# EAGLE board SlimeVRDiyModular_production (EAGLE 9.6.2), part 1 of 2
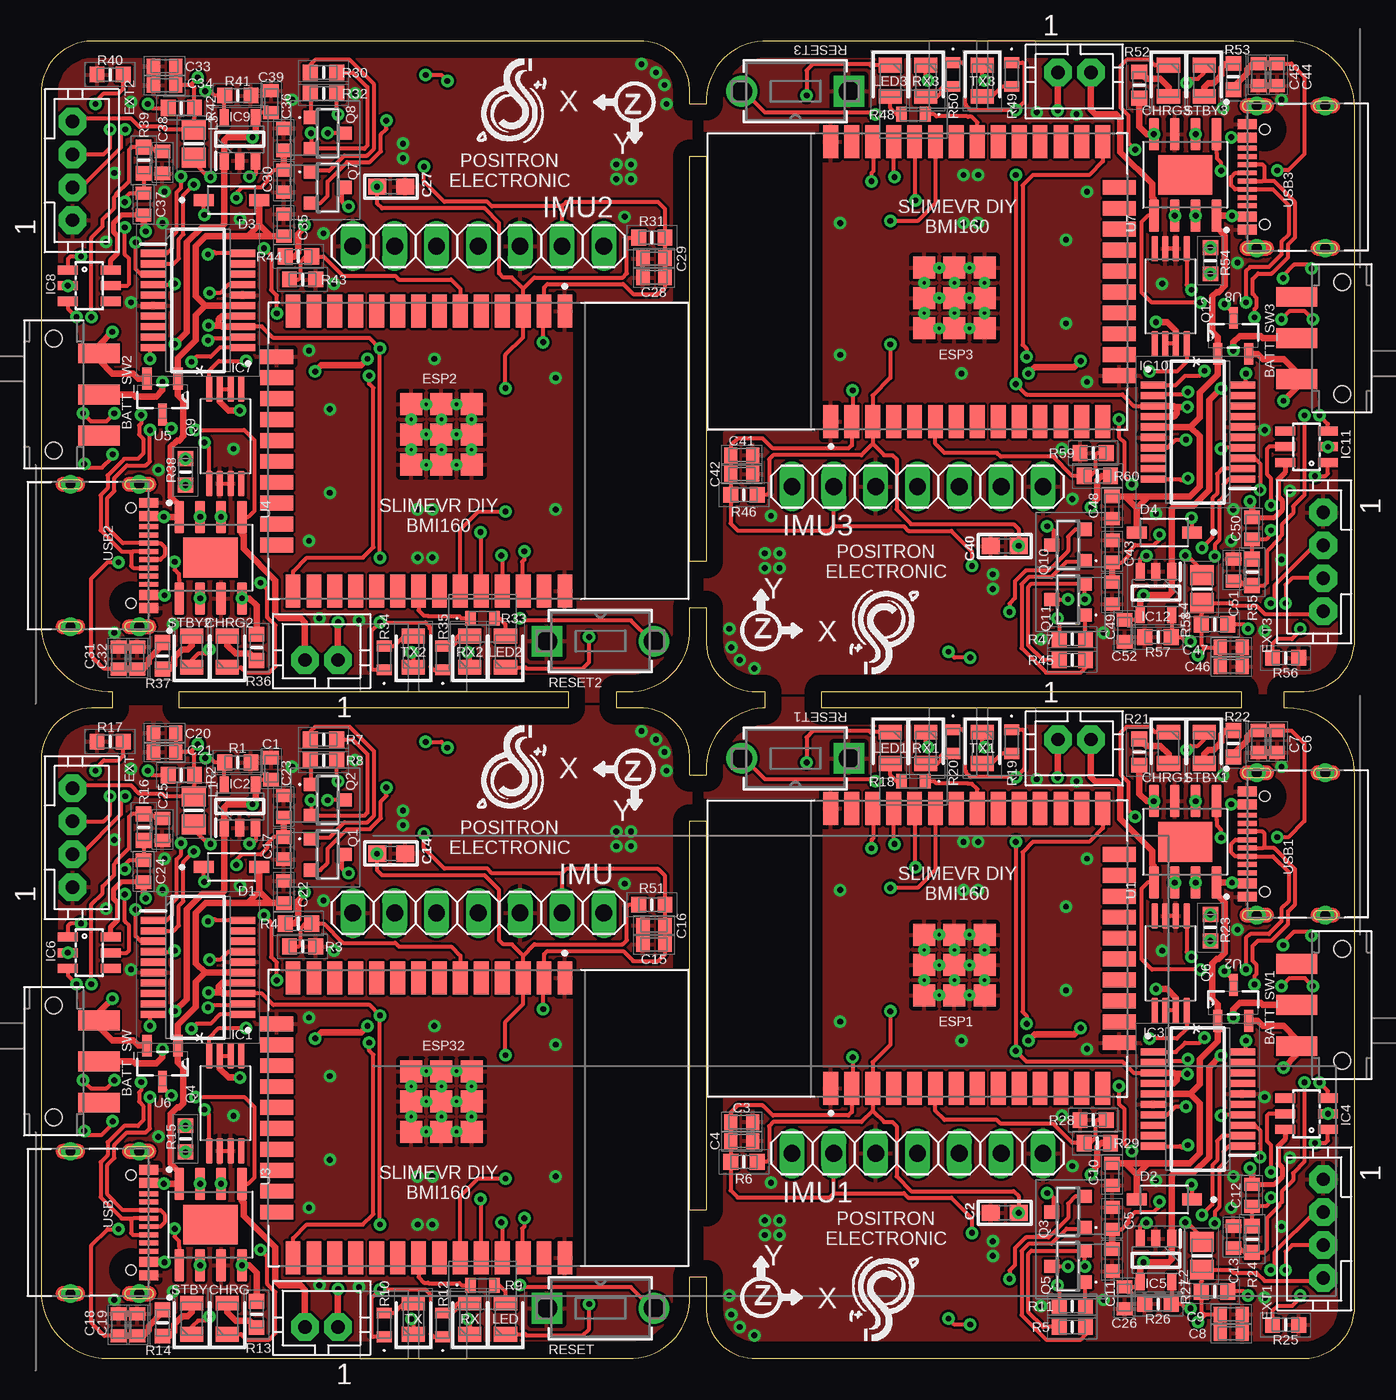
[diagram p0: board, top side]
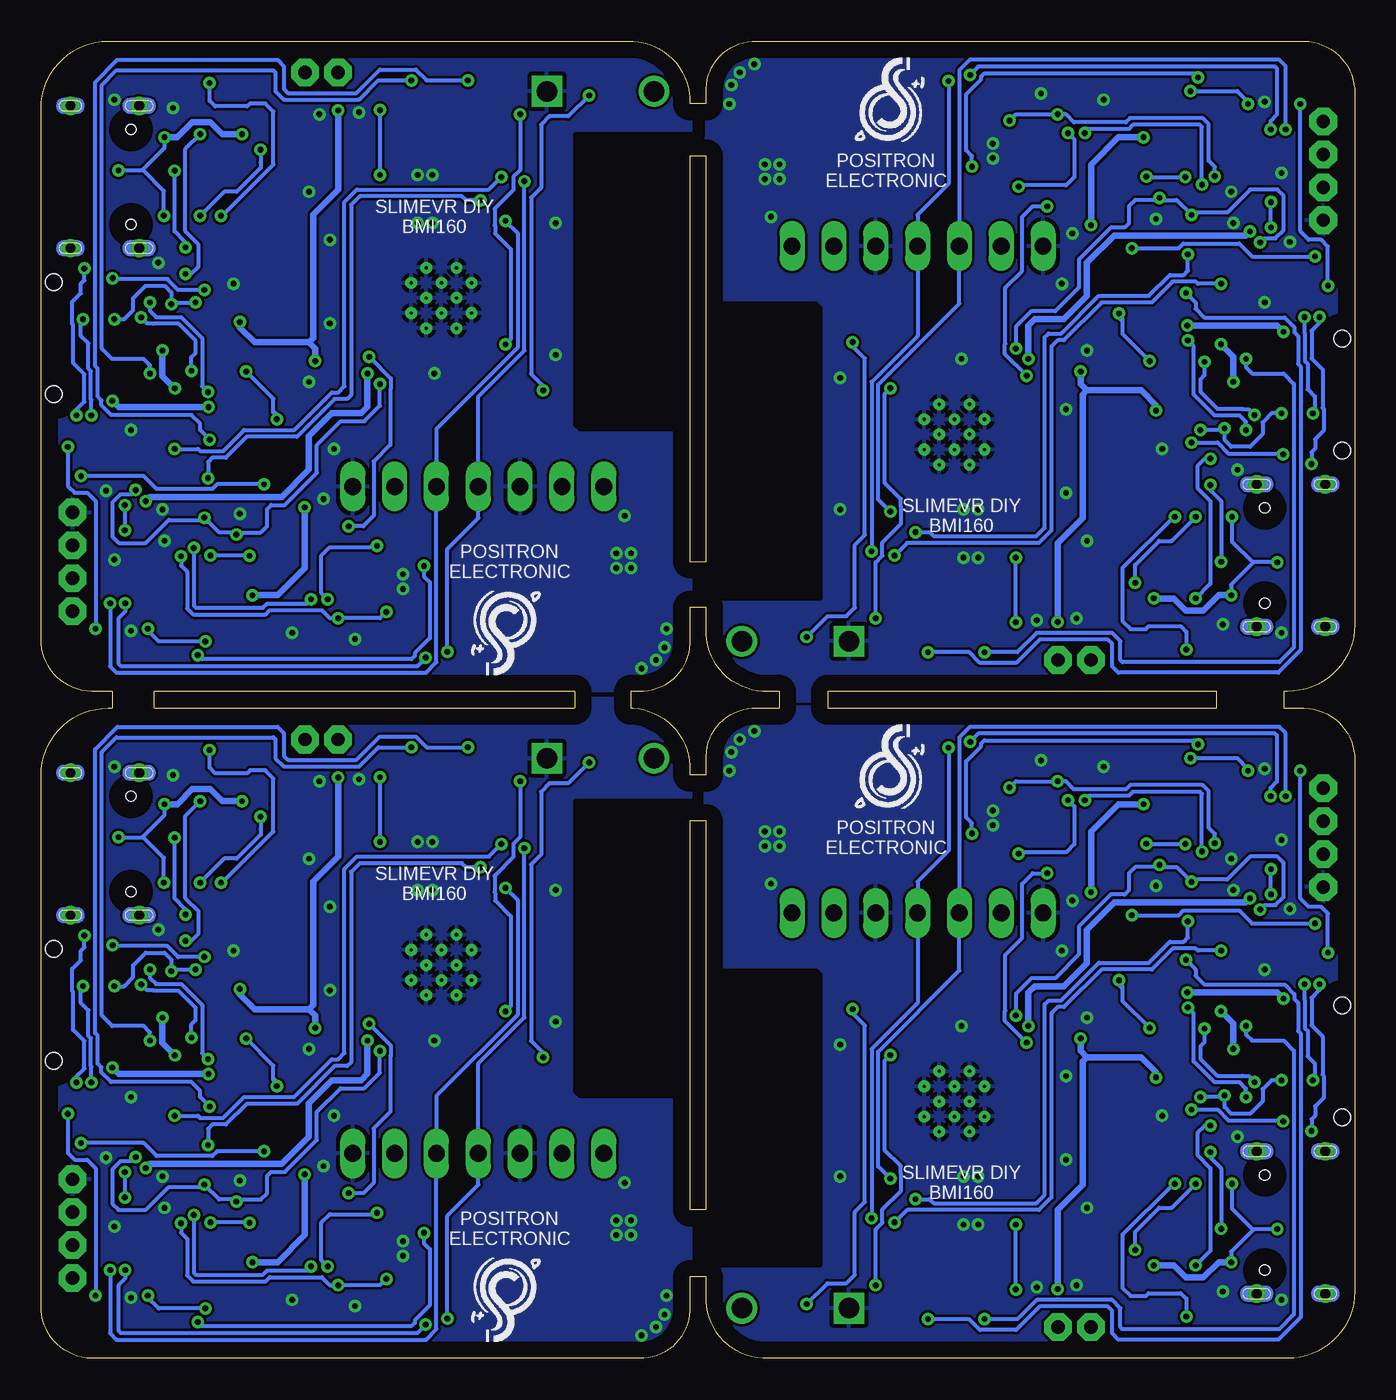
[diagram p1: board, bottom side, seen from below]

Size 79.76 x 80.01 mm. Coordinates in mm from the lower left corner, seen from the top.
Outline: 0,36.32 0,4.06 arc90 4.06,0 35.94,0 arc90 39.37,3.81 39.37,4.95 40.39,4.95 40.39,3.17 arc90 43.18,0 76.71,0 arc90 79.76,3.17 79.76,35.43 arc90 75.69,39.5 75.44,39.5 75.44,40.51 76.71,40.51 arc90 79.76,43.69 79.76,75.95 arc90 75.69,80.01 43.81,80.01 arc90 40.39,76.2 39.37,76.2 39.37,76.83 arc90 36.58,80.01 3.05,80.01 arc90 0,76.83 0,44.58 arc90 4.06,40.51 4.32,40.51 4.32,39.5 3.05,39.5 arc90 0,36.32
Outline: 39.37,9.02 39.37,32.64 40.39,32.64 40.39,9.02 39.37,9.02
Outline: 39.37,35.43 39.37,36.32 arc90 36.58,39.5 34.92,39.5 34.92,40.51 35.94,40.51 arc90 39.37,44.32 39.37,45.59 40.39,45.59 40.39,43.69 arc90 43.18,40.51 43.94,40.51 43.94,39.5 43.81,39.5 arc90 40.39,35.69 40.39,35.43 39.37,35.43
Outline: 32,39.5 8.38,39.5 8.38,40.51 32,40.51 32,39.5
Outline: 72.9,39.5 47.37,39.5 47.37,40.51 72.9,40.51 72.9,39.5
Outline: 39.37,48.39 39.37,73.03 40.39,73.03 40.39,48.39 39.37,48.39
Copper layers (1*16): Top 0.035mm / dielectric 1.5mm / Bottom 0.035mm
Design rules "default *": minimum track width 6mil, minimum drill 0.35mm, track to track 6mil, track to pad 6mil, pad to pad 6mil, via to via 6mil, smd to smd 6mil, copper to edge 40mil, drill to drill 6mil, minimum pad ring 10mil, minimum via ring 8mil, stop-mask expansion 4mil, vias tented up to drill 0.36mm, thermal gap 10mil
Net classes: 1 highpower: width 0.406 mm, drill 0.483 mm

## Footprints (pad centres in the part's own frame; a part is rotated, then mirrored left to right if it is on the bottom)
SW_JS102011SAQN = smd 1.2 x 2.5: 1 -2.5,2.75; 2 0,2.75; 3 2.5,2.75 | hole 1: -3.4,0; 3.4,0
CAPC1608X87N = smd 0.8 x 0.94: 1 -0.67,0; 2 0.67,0
0603 = smd 1.1 x 1: 1 -0.85,0; 2 0.85,0
LEDC2012X80N = smd 0.9 x 1.4: 1 -0.95,0; 2 0.95,0
SOD3715X145N = smd 1.21 x 0.73: A 1.68,0; C -1.68,0
MODULE_ESP32-WROOM-32D = smd 2 x 0.9: 1 -8.5,5.26; 2 -8.5,3.99; 3 -8.5,2.72; 4 -8.5,1.45; 5 -8.5,0.18; 6 -8.5,-1.09; 7 -8.5,-2.36; 8 -8.5,-3.63; 9 -8.5,-4.9; 10 -8.5,-6.17; 11 -8.5,-7.44; 12 -8.5,-8.71; 13 -8.5,-9.98; 14 -8.5,-11.25; 25 8.5,-11.25; 26 8.5,-9.98; 27 8.5,-8.71; 28 8.5,-7.44; 29 8.5,-6.17; 30 8.5,-4.9; 31 8.5,-3.63; 32 8.5,-2.36; 33 8.5,-1.09; 34 8.5,0.18; 35 8.5,1.45; 36 8.5,2.72; 37 8.5,3.99; 38 8.5,5.26 | smd 0.9 x 2: 15 -5.715,-12.25; 16 -4.445,-12.25; 17 -3.175,-12.25; 18 -1.905,-12.25; 19 -0.635,-12.25; 20 0.635,-12.25; 21 1.905,-12.25; 22 3.175,-12.25; 23 4.445,-12.25; 24 5.715,-12.25 | smd 1.33 x 1.33: 39_1 -2.835,-0.405; 39_2 -1,-0.405; 39_3 0.835,-0.405; 39_4 -2.835,-2.24; 39_5 -1,-2.24; 39_6 0.835,-2.24; 39_7 -2.835,-4.075; 39_8 -1,-4.075; 39_9 0.835,-4.075 | drill 0.2 pad 0.3: 39_10 -1.917,-0.405; 39_11 -0.083,-0.405; 39_12 -2.835,-1.323; 39_13 -1,-1.323; 39_14 0.835,-1.323; 39_15 -1.917,-2.24; 39_16 -0.083,-2.24; 39_17 -2.835,-3.158; 39_18 -1,-3.158; 39_19 0.835,-3.158; 39_20 -1.917,-4.075; 39_21 -0.083,-4.075
JST-PH4 = drill 0.813 pad 1.676 octagon: 1 3,0; 2 1,0; 3 -1,0; 4 -3,0
SOP64P599X175-20N = smd 1.526 x 0.435: 1 -2.712,2.858; 2 -2.712,2.222; 3 -2.712,1.588; 4 -2.712,0.952; 5 -2.712,0.318; 6 -2.712,-0.318; 7 -2.712,-0.952; 8 -2.712,-1.588; 9 -2.712,-2.222; 10 -2.712,-2.858; 11 2.712,-2.858; 12 2.712,-2.222; 13 2.712,-1.588; 14 2.712,-0.952; 15 2.712,-0.318; 16 2.712,0.318; 17 2.712,0.952; 18 2.712,1.588; 19 2.712,2.222; 20 2.712,2.858
SOT95P280X100-5N = smd 1.05 x 0.55: 1 -1.3,0.95; 2 -1.3,0; 3 -1.3,-0.95; 4 1.3,-0.95; 5 1.3,0.95
SOT23-6 = smd 0.55 x 1.2: 1 -0.95,-1.3; 2 0,-1.3; 3 0.95,-1.3; 4 0.95,1.3; 5 0,1.3; 6 -0.95,1.3
1X07 = drill 1.016 long: 1 -7.62,0; 2 -5.08,0; 3 -2.54,0; 4 0,0; 5 2.54,0; 6 5.08,0; 7 7.62,0
INDC2012X105N = smd 1.2 x 1.45: 1 -0.85,0; 2 0.85,0
JST-PH2 = drill 0.813 pad 1.676 octagon: 1 1,0; 2 -1,0
SI2305TP = smd 0.8 x 0.9: 1 -0.95,-1; 2 0.95,-1; 3 0,1
SOP65P640X120-8N = smd 1.56 x 0.4: 1 -2.88,0.975; 2 -2.88,0.325; 3 -2.88,-0.325; 4 -2.88,-0.975; 5 2.88,-0.975; 6 2.88,-0.325; 7 2.88,0.325; 8 2.88,0.975
RESC1608X55N = smd 0.9 x 0.95: 1 -0.8,0; 2 0.8,0
RESC1608X55N' = smd 0.9 x 1: 1 -0.8,0; 2 0.8,0
ERJH3 = smd 0.65 x 0.9: 1 -0.725,0; 2 0.725,0
SWDIP2_256X170P100 = drill 1.245 pad 1.753 square: 1 -6.502,0 | drill 1.245 pad 1.753: 2 0,0
SOP127P600X175-9N = smd 1.97 x 0.6: 1 -2.475,1.905; 2 -2.475,0.635; 3 -2.475,-0.635; 4 -2.475,-1.905; 5 2.475,-1.905; 6 2.475,-0.635; 7 2.475,0.635; 8 2.475,1.905 | smd 2.413 x 3.302: 9 0,0
SOT95P237X112-3N = smd 1.321 x 0.559: 1 -1.092,0.94; 2 -1.092,-0.94 | smd 1.321 x 0.508: 3 1.092,0
HRO_TYPE-C-31-M-12 = smd 0.6 x 1.14: A1_B12 -3.2,4.75; A4_B9 -2.4,4.75; B1_A12 3.2,4.75; B4_A9 2.4,4.75 | smd 0.3 x 1.14: A5 -1.25,4.75; A6 -0.25,4.75; A7 0.25,4.75; A8 1.25,4.75; B5 1.75,4.75; B6 0.75,4.75; B7 -0.75,4.75; B8 -1.75,4.75 | drill 0.6 pad 0.9: S1 -4.325,4.17; S2 4.325,4.17; S3 -4.325,0; S4 4.325,0 | hole 0.6: -2.89,3.68; 2.89,3.68

## Placement (x,y rotation side)
BATT_SW  JS102011SAQN  [SW_JS102011SAQN]  0.76,18.03 270 top
BATT_SW1  JS102011SAQN  [SW_JS102011SAQN]  78.99,21.46 90 top
BATT_SW2  JS102011SAQN  [SW_JS102011SAQN]  0.76,58.55 270 top
BATT_SW3  JS102011SAQN  [SW_JS102011SAQN]  78.99,61.98 90 top
C1  100nf  [CAPC1608X87N]  13.97,35.81 270 top
C2  1uF  [0603]  58.51,8.84 180 top
C3  100nf  [CAPC1608X87N]  42.55,14.35 180 top
C4  10nf  [CAPC1608X87N]  42.55,13.21 180 top
C5  100nf  [CAPC1608X87N]  65.02,8.51 90 top
C6  100nf  [CAPC1608X87N]  75.06,37.47 90 top
C7  100nf  [CAPC1608X87N]  73.91,37.47 270 top
C8  1uf  [CAPC1608X87N]  72.26,1.52 180 top
C9  10nf  [CAPC1608X87N]  72.26,2.67 180 top
C10  1uf  [CAPC1608X87N]  65.02,11.18 90 top
C11  100nf  [CAPC1608X87N]  65.02,5.97 90 top
C12  100nf  [CAPC1608X87N]  73.53,9.91 270 top
C13  100nf  [CAPC1608X87N]  72.39,7.37 270 top
C14  1uF  [0603]  21.25,30.66 0 top
C15  100nf  [CAPC1608X87N]  37.21,25.15 0 top
C16  10nf  [CAPC1608X87N]  37.21,26.29 0 top
C17  100nf  [CAPC1608X87N]  14.73,30.99 270 top
C18  100nf  [CAPC1608X87N]  4.7,2.03 270 top
C19  100nf  [CAPC1608X87N]  5.84,2.03 90 top
C20  1uf  [CAPC1608X87N]  7.49,37.97 0 top
C21  10nf  [CAPC1608X87N]  7.49,36.83 0 top
C22  1uf  [CAPC1608X87N]  14.73,28.32 270 top
C23  100nf  [CAPC1608X87N]  14.73,33.53 270 top
C24  100nf  [CAPC1608X87N]  6.22,29.59 90 top
C25  100nf  [CAPC1608X87N]  7.37,32.13 90 top
C26  100nf  [CAPC1608X87N]  65.79,3.68 90 top
C27  1uF  [0603]  21.25,71.17 0 top
C28  100nf  [CAPC1608X87N]  37.21,65.66 0 top
C29  10nf  [CAPC1608X87N]  37.21,66.8 0 top
C30  100nf  [CAPC1608X87N]  14.73,71.5 270 top
C31  100nf  [CAPC1608X87N]  4.7,42.55 270 top
C32  100nf  [CAPC1608X87N]  5.84,42.55 90 top
C33  1uf  [CAPC1608X87N]  7.49,78.49 0 top
C34  10nf  [CAPC1608X87N]  7.49,77.34 0 top
C35  1uf  [CAPC1608X87N]  14.73,68.83 270 top
C36  100nf  [CAPC1608X87N]  14.73,74.04 270 top
C37  100nf  [CAPC1608X87N]  6.22,70.1 90 top
C38  100nf  [CAPC1608X87N]  7.37,72.64 90 top
C39  100nf  [CAPC1608X87N]  13.97,76.33 270 top
C40  1uF  [0603]  58.51,49.35 180 top
C41  100nf  [CAPC1608X87N]  42.55,54.86 180 top
C42  10nf  [CAPC1608X87N]  42.55,53.72 180 top
C43  100nf  [CAPC1608X87N]  65.02,49.02 90 top
C44  100nf  [CAPC1608X87N]  75.06,77.98 90 top
C45  100nf  [CAPC1608X87N]  73.91,77.98 270 top
C46  1uf  [CAPC1608X87N]  72.26,42.04 180 top
C47  10nf  [CAPC1608X87N]  72.26,43.18 180 top
C48  1uf  [CAPC1608X87N]  65.02,51.69 90 top
C49  100nf  [CAPC1608X87N]  65.02,46.48 90 top
C50  100nf  [CAPC1608X87N]  73.53,50.42 270 top
C51  100nf  [CAPC1608X87N]  72.39,47.88 270 top
C52  100nf  [CAPC1608X87N]  65.79,44.2 90 top
CHRG  Green  [LEDC2012X80N]  11.3,2.41 90 top
CHRG1  Green  [LEDC2012X80N]  68.45,37.08 270 top
CHRG2  Green  [LEDC2012X80N]  11.3,42.93 90 top
CHRG3  Green  [LEDC2012X80N]  68.45,77.6 270 top
D1  1N5819HW-7  [SOD3715X145N]  11.56,29.84 0 top
D2  1N5819HW-7  [SOD3715X145N]  68.2,9.65 180 top
D3  1N5819HW-7  [SOD3715X145N]  11.56,70.36 0 top
D4  1N5819HW-7  [SOD3715X145N]  68.2,50.17 180 top
ESP1  ESP32-WROOM-32D  [MODULE_ESP32-WROOM-32D]  53.21,24.89 90 top
ESP2  ESP32-WROOM-32D  [MODULE_ESP32-WROOM-32D]  26.54,55.12 270 top
ESP3  ESP32-WROOM-32D  [MODULE_ESP32-WROOM-32D]  53.21,65.41 90 top
ESP32  ESP32-WROOM-32D  [MODULE_ESP32-WROOM-32D]  26.54,14.6 270 top
EXT  [JST-PH4]  1.9,31.62 270 top
EXT1  [JST-PH4]  77.85,7.87 90 top
EXT2  [JST-PH4]  1.9,72.14 270 top
EXT3  [JST-PH4]  77.85,48.39 90 top
IC1  FT231XS-R  [SOP64P599X175-20N]  9.53,23.75 0 top
IC2  M3406-ADJ  [SOT95P280X100-5N]  12.06,33.53 90 top
IC3  FT231XS-R  [SOP64P599X175-20N]  70.23,15.75 180 top
IC4  DW01A  [SOT23-6]  76.84,14.86 90 top
IC5  M3406-ADJ  [SOT95P280X100-5N]  67.69,5.97 270 top
IC6  DW01A  [SOT23-6]  2.92,24.64 270 top
IC7  FT231XS-R  [SOP64P599X175-20N]  9.53,64.26 0 top
IC8  DW01A  [SOT23-6]  2.92,65.15 270 top
IC9  M3406-ADJ  [SOT95P280X100-5N]  12.06,74.04 90 top
IC10  FT231XS-R  [SOP64P599X175-20N]  70.23,56.26 180 top
IC11  DW01A  [SOT23-6]  76.84,55.37 90 top
IC12  M3406-ADJ  [SOT95P280X100-5N]  67.69,46.48 270 top
IMU  [1X07]  26.54,27.05 180 top
IMU1  [1X07]  53.21,12.45 0 top
IMU2  [1X07]  26.54,67.56 180 top
IMU3  [1X07]  53.21,52.96 0 top
L1  MLF2012A2R2KT000  [INDC2012X105N]  9.27,33.27 90 top
L2  MLF2012A2R2KT000  [INDC2012X105N]  70.48,6.22 270 top
L3  MLF2012A2R2KT000  [INDC2012X105N]  9.27,73.79 90 top
L4  MLF2012A2R2KT000  [INDC2012X105N]  70.48,46.74 270 top
LED  Green  [LEDC2012X80N]  28.19,2.41 90 top
LED1  Green  [LEDC2012X80N]  51.56,37.08 270 top
LED2  Green  [LEDC2012X80N]  28.19,42.93 90 top
LED3  Green  [LEDC2012X80N]  51.56,77.6 270 top
P1  [JST-PH2]  17.02,1.91 0 top
P2  [JST-PH2]  62.74,37.59 180 top
P3  [JST-PH2]  17.02,42.42 0 top
P4  [JST-PH2]  62.74,78.11 180 top
Q1  MMBT3904-TP  [SI2305TP]  17.4,30.61 270 top
Q2  MMBT3904-TP  [SI2305TP]  17.4,33.91 270 top
Q3  MMBT3904-TP  [SI2305TP]  62.36,8.89 90 top
Q4  FS8205A  [SOP65P640X120-8N]  11.18,15.49 270 top
Q5  MMBT3904-TP  [SI2305TP]  62.36,5.59 90 top
Q6  FS8205A  [SOP65P640X120-8N]  68.58,24 90 top
Q7  MMBT3904-TP  [SI2305TP]  17.4,71.12 270 top
Q8  MMBT3904-TP  [SI2305TP]  17.4,74.42 270 top
Q9  FS8205A  [SOP65P640X120-8N]  11.18,56.01 270 top
Q10  MMBT3904-TP  [SI2305TP]  62.36,49.4 90 top
Q11  MMBT3904-TP  [SI2305TP]  62.36,46.1 90 top
Q12  FS8205A  [SOP65P640X120-8N]  68.58,64.52 90 top
R1  10k  [RESC1608X55N]  11.94,36.19 0 top
R2  40k2  [RESC1608X55N']  8.51,35.43 0 top
R3  10k  [RESC1608X55N]  15.88,25.02 0 top
R4  40k2  [RESC1608X55N']  15.62,26.42 180 top
R5  10k  [RESC1608X55N]  62.61,3.17 0 top
R6  10k  [RESC1608X55N]  42.67,11.94 0 top
R7  10k  [RESC1608X55N]  17.15,36.32 180 top
R8  10k  [RESC1608X55N]  17.15,37.59 180 top
R9  330  [ERJH3]  26.8,4.45 0 top
R10  330  [ERJH3]  20.83,2.03 90 top
R11  10k  [RESC1608X55N]  62.61,1.91 0 top
R12  330  [ERJH3]  24.38,2.03 90 top
R13  1k  [RESC1608X55N]  13.08,2.67 270 top
R14  1k  [RESC1608X55N]  7.37,2.16 270 top
R15  1.2k  [RESC1608X55N]  8.76,13.34 90 top
R16  100  [RESC1608X55N]  6.22,32.26 90 top
R17  1k  [RESC1608X55N]  4.19,37.47 0 top
R18  330  [ERJH3]  52.96,35.05 180 top
R19  330  [ERJH3]  58.93,37.47 270 top
R20  330  [ERJH3]  55.37,37.47 270 top
R21  1k  [RESC1608X55N]  66.68,36.83 90 top
R22  1k  [RESC1608X55N]  72.39,37.34 90 top
R23  1.2k  [RESC1608X55N]  70.99,26.16 270 top
R24  100  [RESC1608X55N]  73.53,7.24 270 top
R25  1k  [RESC1608X55N]  75.57,2.03 180 top
R26  10k  [RESC1608X55N]  67.82,3.3 180 top
R27  40k2  [RESC1608X55N']  71.25,4.06 180 top
R28  10k  [RESC1608X55N]  63.88,14.48 180 top
R29  40k2  [RESC1608X55N']  64.14,13.08 0 top
R30  10k  [RESC1608X55N]  17.15,76.83 180 top
R31  10k  [RESC1608X55N]  37.08,68.07 180 top
R32  10k  [RESC1608X55N]  17.15,78.11 180 top
R33  330  [ERJH3]  26.8,44.96 0 top
R34  330  [ERJH3]  20.83,42.55 90 top
R35  330  [ERJH3]  24.38,42.55 90 top
R36  1k  [RESC1608X55N]  13.08,43.18 270 top
R37  1k  [RESC1608X55N]  7.37,42.67 270 top
R38  1.2k  [RESC1608X55N]  8.76,53.85 90 top
R39  100  [RESC1608X55N]  6.22,72.77 90 top
R40  1k  [RESC1608X55N]  4.19,77.98 0 top
R41  10k  [RESC1608X55N]  11.94,76.71 0 top
R42  40k2  [RESC1608X55N']  8.51,75.95 0 top
R43  10k  [RESC1608X55N]  15.88,65.53 0 top
R44  40k2  [RESC1608X55N']  15.62,66.93 180 top
R45  10k  [RESC1608X55N]  62.61,43.69 0 top
R46  10k  [RESC1608X55N]  42.67,52.45 0 top
R47  10k  [RESC1608X55N]  62.61,42.42 0 top
R48  330  [ERJH3]  52.96,75.56 180 top
R49  330  [ERJH3]  58.93,77.98 270 top
R50  330  [ERJH3]  55.37,77.98 270 top
R51  10k  [RESC1608X55N]  37.08,27.56 180 top
R52  1k  [RESC1608X55N]  66.68,77.34 90 top
R53  1k  [RESC1608X55N]  72.39,77.85 90 top
R54  1.2k  [RESC1608X55N]  70.99,66.67 270 top
R55  100  [RESC1608X55N]  73.53,47.75 270 top
R56  1k  [RESC1608X55N]  75.57,42.55 180 top
R57  10k  [RESC1608X55N]  67.82,43.81 180 top
R58  40k2  [RESC1608X55N']  71.25,44.58 180 top
R59  10k  [RESC1608X55N]  63.88,54.99 180 top
R60  40k2  [RESC1608X55N']  64.14,53.59 0 top
RESET  1825966-1  [SWDIP2_256X170P100]  37.21,3.05 0 top
RESET1  1825966-1  [SWDIP2_256X170P100]  42.55,36.45 180 top
RESET2  1825966-1  [SWDIP2_256X170P100]  37.21,43.56 0 top
RESET3  1825966-1  [SWDIP2_256X170P100]  42.55,76.96 180 top
RX  Green  [LEDC2012X80N]  26.03,2.41 90 top
RX1  Green  [LEDC2012X80N]  53.72,37.08 270 top
RX2  Green  [LEDC2012X80N]  26.03,42.93 90 top
RX3  Green  [LEDC2012X80N]  53.72,77.6 270 top
STBY  Green  [LEDC2012X80N]  9.14,2.41 90 top
STBY1  Green  [LEDC2012X80N]  70.61,37.08 270 top
STBY2  Green  [LEDC2012X80N]  9.14,42.93 90 top
STBY3  Green  [LEDC2012X80N]  70.61,77.6 270 top
TX  Green  [LEDC2012X80N]  22.61,2.41 90 top
TX1  Green  [LEDC2012X80N]  57.15,37.08 270 top
TX2  Green  [LEDC2012X80N]  22.61,42.93 90 top
TX3  Green  [LEDC2012X80N]  57.15,77.6 270 top
U1  TP4056  [SOP127P600X175-9N]  69.47,31.37 270 top
U2  SI2301BDS-T1-E3  [SOT95P237X112-3N]  72.39,21.59 90 top
U3  TP4056  [SOP127P600X175-9N]  10.29,8.13 90 top
U4  TP4056  [SOP127P600X175-9N]  10.29,48.64 90 top
U5  SI2301BDS-T1-E3  [SOT95P237X112-3N]  7.37,58.42 270 top
U6  SI2301BDS-T1-E3  [SOT95P237X112-3N]  7.37,17.91 270 top
U7  TP4056  [SOP127P600X175-9N]  69.47,71.88 270 top
U8  SI2301BDS-T1-E3  [SOT95P237X112-3N]  72.39,62.1 90 top
USB  TYPE-C-31-M-12  [HRO_TYPE-C-31-M-12]  1.78,8.26 270 top
USB1  TYPE-C-31-M-12  [HRO_TYPE-C-31-M-12]  77.98,31.24 90 top
USB2  TYPE-C-31-M-12  [HRO_TYPE-C-31-M-12]  1.78,48.77 270 top
USB3  TYPE-C-31-M-12  [HRO_TYPE-C-31-M-12]  77.98,71.75 90 top

## Library data of the parts
BATT_SW BATT_SW1-BATT_SW3 = JS102011SAQN; AVAILABILITY: In Stock; CHECK_PRICES: https://www.snapeda.com/parts/JS102011SAQN/C%2526K/view-part/?ref=eda; DESCRIPTION: Slide Switch SPDT Surface Mount, Right Angle; MF: C&K; MP: JS102011SAQN; PACKAGE: None; PRICE: None; PURCHASE-URL: https://pricing.snapeda.com/search?q=JS102011SAQN&ref=eda; SNAPEDA_LINK: https://www.snapeda.com/parts/JS102011SAQN/C%2526K/view-part/?ref=snap
C1 C3 C5-C8 C10-C13 C15 C17-C20 C22-C26 C28 C30-C33 C35-C39 C41 C43-C46 C48-C52 = AccesControlNFC; DESCRIPTION: Wurth Elektronik 0603 WCAP-CSGP 100nF Ceramic Multilayer Capacitor, 25 V dc, +125C, X7R Dielectric, +/-10%; DIGIKEY_PARTNUMBER: 732-7989-1-ND; DIGIKEY_PRICE-STOCK: https://www.digikey.com/product-detail/en/w%C3%BCrth-elektronik/885012206071/732-7989-1-ND/5454616; HEIGHT: 0.87mm; MANUFACTURER_NAME: Wurth Elektronik; MANUFACTURER_PART_NUMBER: 885012206071; MOUSER_PART_NUMBER: 710-885012206071; MOUSER_PRICE-STOCK: https://www.mouser.co.uk/ProductDetail/Wurth-Elektronik/885012206071?qs=0KOYDY2FL2%2FEBQkuHgvarg%3D%3D
C2 C14 C27 C40 = microbuilder
C4 C9 C16 C21 C29 C34 C42 C47 = AccesControlNFC; DESCRIPTION: Wurth Elektronik 0603 WCAP-CSGP 10nF Ceramic Multilayer Capacitor, 50 V dc, +125C, X7R Dielectric, +/-10%; DIGIKEY_PARTNUMBER: 732-8007-1-ND; DIGIKEY_PRICE-STOCK: https://www.digikey.com/product-detail/en/w%C3%BCrth-elektronik/885012206089/732-8007-1-ND/5454634; HEIGHT: 0.87mm; MANUFACTURER_NAME: Wurth Elektronik; MANUFACTURER_PART_NUMBER: 885012206089; MOUSER_PART_NUMBER: 710-885012206089; MOUSER_PRICE-STOCK: https://www.mouser.co.uk/ProductDetail/Wurth-Elektronik/885012206089?qs=0KOYDY2FL28GvSbKh319Tw%3D%3D
CHRG CHRG1-CHRG3 LED LED1-LED3 RX RX1-RX3 STBY STBY1-STBY3 TX TX1-TX3 = AccesControlNFC; DESCRIPTION: LED,Wurth Elektronik,150080BS75000 Wurth Elektronik 150080BS75000, WL-SMCW Series Blue LED, 470 nm 2012 (0805) Clear, Rectangle Lens SMD package; HEIGHT: 0.8mm; MANUFACTURER_NAME: Wurth Elektronik; MANUFACTURER_PART_NUMBER: 150080BS75000; MOUSER_PART_NUMBER: 710-150080BS75000; MOUSER_PRICE-STOCK: https://www.mouser.co.uk/ProductDetail/Wurth-Elektronik/150080BS75000?qs=2kOmHSv6VfT2tBo3UPVqAQ%3D%3D
D1-D4 = 1N5819HW-7; AVAILABILITY: In Stock; CHECK_PRICES: https://www.snapeda.com/parts/1N5819HW-7/Diodes+Inc./view-part/?ref=eda; DESCRIPTION: Diode Schottky 40 V 1A Surface Mount SOD-123; MF: Diodes Inc.; MP: 1N5819HW-7; PACKAGE: SOD-123 Fairchild Semiconductor; PRICE: None; PURCHASE-URL: https://www.snapeda.com/api/url_track_click_mouser/?unipart_id=51510&manufacturer=Diodes Inc.&part_name=1N5819HW-7&search_term=1n5819; SNAPEDA_LINK: https://www.snapeda.com/parts/1N5819HW-7/Diodes+Inc./view-part/?ref=snap
ESP1-ESP3 ESP32 = AccesControlNFC; AVAILABILITY: In Stock; DESCRIPTION: Bluetooth, WiFi 802.11b/g/n, Bluetooth v4.2 +EDR, Class 1, 2 and 3 Transceiver Module 2.4GHz ~ 2.5GHz Integrated; MF: Espressif Systems; MP: ESP32-WROOM-32D; PACKAGE: Module Espressif Systems; PRICE: None; PURCHASE-URL: https://pricing.snapeda.com/search/part/ESP32-WROOM-32D/?ref=eda
EXT EXT1-EXT3 P1-P4 = jst-ph
IC1 IC3 IC7 IC10 = AccesControlNFC; DESCRIPTION: FTDI Chip FT231XS-R, Interface RS232, RS422, RS485, SIE, UART 3MBd, 5 V, 20-pin, SSOP; HEIGHT: 1.753mm; MANUFACTURER_NAME: FTDI Chip; MANUFACTURER_PART_NUMBER: FT231XS-R; MOUSER_PART_NUMBER: 895-FT231XS-R; MOUSER_PRICE-STOCK: https://www.mouser.co.uk/ProductDetail/FTDI/FT231XS-R?qs=Gp1Yz1mis3WduRPsgrTbtg%3D%3D
IC2 IC5 IC9 IC12 = M3406; DESCRIPTION: Step-down type SOT-23-5 DC-DC Converters ROHS; HEIGHT: 1mm; LCSC_PART_NUMBER: C83224; LCSC_PRICE-STOCK: https://www.lcsc.com/product-detail/DC-DC-Converters_XI-AN-Aerosemi-Tech-M3406-ADJ_C83224.html; MANUFACTURER_NAME: XI'AN Aerosemi Tech; MANUFACTURER_PART_NUMBER: M3406-ADJ
IC4 IC6 IC8 IC11 = DW01A; AVAILABILITY: Not in stock; CHECK_PRICES: https://www.snapeda.com/parts/DW01A/Fortune+Semiconductor/view-part/?ref=eda; DESCRIPTION: One Cell Lithium-ion/Polymer Battery Protection IC; MF: Fortune Semiconductor; MP: DW01A; PACKAGE: SOT-23-6 Fortune Semiconductor; PRICE: None; SNAPEDA_LINK: https://www.snapeda.com/parts/DW01A/Fortune+Semiconductor/view-part/?ref=snap
IMU IMU1-IMU3 = pinhead
L1-L4 = MLF2012A2R2KT000; DESCRIPTION: 2.2 H Shielded Multilayer Inductor 50 mA 500mOhm Max 0805 (2012 Metric); HEIGHT: 1.05mm; MANUFACTURER_NAME: TDK; MANUFACTURER_PART_NUMBER: MLF2012A2R2KT000; MOUSER_PART_NUMBER: 810-MLF2012A2R2KT000; MOUSER_PRICE-STOCK: https://www.mouser.co.uk/ProductDetail/TDK/MLF2012A2R2KT000?qs=pLY5GE0xrmL3Y2Jw%2FEGjFg%3D%3D
Q1-Q3 Q5 Q7 Q8 Q10 Q11 = AccesControlNFC; DESCRIPTION: Bipolar Transistors - BJT 40V; HEIGHT: mm; MANUFACTURER_NAME: Micro Commercial Components (MCC); MANUFACTURER_PART_NUMBER: MMBT3904-TP; MOUSER_PART_NUMBER: 833-MMBT3904-TP; MOUSER_PRICE-STOCK: https://www.mouser.co.uk/ProductDetail/Micro-Commercial-Components-MCC/MMBT3904-TP?qs=KFo7JewZbUHicjDjIayULQ%3D%3D
Q4 Q6 Q9 Q12 = FS8205A; AVAILABILITY: Not in stock; CHECK_PRICES: https://www.snapeda.com/parts/FS8205A/Fortune+Semiconductor/view-part/?ref=eda; MF: Fortune Semiconductor; MP: FS8205A; PACKAGE: Package; PRICE: None; SNAPEDA_LINK: https://www.snapeda.com/parts/FS8205A/Fortune+Semiconductor/view-part/?ref=snap
R1 R3 R5-R8 R11 R26 R28 R30-R32 R41 R43 R45-R47 R51 R57 R59 = AccesControlNFC; DESCRIPTION: Thick Film Resistors - SMD 0603 10Kohm 5% Anti Surge AEC-Q200; DIGIKEY_PARTNUMBER: RHM10KDCT-ND; DIGIKEY_PRICE-STOCK: https://www.digikey.com/product-detail/en/rohm-semiconductor/ESR03EZPJ103/RHM10KDCT-ND/1762925; HEIGHT: 0.55mm; MANUFACTURER_NAME: ROHM Semiconductor; MANUFACTURER_PART_NUMBER: ESR03EZPJ103; MOUSER_PART_NUMBER: 755-ESR03EZPJ103; MOUSER_PRICE-STOCK: https://www.mouser.com/Search/Refine.aspx?Keyword=755-ESR03EZPJ103
R2 R4 R27 R29 R42 R44 R58 R60 = ERJ-S03F4022V; DESCRIPTION: Thick Film Resistors - SMD 0603 40.2Kohms 1% Anti-Sulfur; HEIGHT: 0.55mm; MANUFACTURER_NAME: Panasonic; MANUFACTURER_PART_NUMBER: ERJ-S03F4022V; MOUSER_PART_NUMBER: 667-ERJ-S03F4022V; MOUSER_PRICE-STOCK: https://www.mouser.com/Search/Refine.aspx?Keyword=667-ERJ-S03F4022V
R9 R10 R12 R18-R20 R33-R35 R48-R50 = AccesControlNFC; DESCRIPTION: Power Rating 0.125W,Resistance 330 Ohm,LxW(EIA) 1.6 x 0.8 (EIA:0603) mm; HEIGHT: mm; MANUFACTURER_NAME: Panasonic; MANUFACTURER_PART_NUMBER: ERJ-H3EF3300V; MOUSER_PART_NUMBER: 667-ERJ-H3EF3300V; MOUSER_PRICE-STOCK: https://www.mouser.co.uk/ProductDetail/Panasonic/ERJ-H3EF3300V?qs=eP2BKZSCXI61roRLPi8W7w%3D%3D
R13-R17 R21-R25 R36-R40 R52-R56 = AccesControlNFC; DESCRIPTION: Thick Film Resistors - SMD 0603 1Kohm 5% Anti Surge AEC-Q200; DIGIKEY_PARTNUMBER: RHM1.0KDCT-ND; DIGIKEY_PRICE-STOCK: https://www.digikey.com/product-detail/en/rohm-semiconductor/ESR03EZPJ102/RHM1-0KDCT-ND/1762924; HEIGHT: 0.55mm; MANUFACTURER_NAME: ROHM Semiconductor; MANUFACTURER_PART_NUMBER: ESR03EZPJ102; MOUSER_PART_NUMBER: 755-ESR03EZPJ102; MOUSER_PRICE-STOCK: https://www.mouser.co.uk/ProductDetail/ROHM-Semiconductor/ESR03EZPJ102?qs=DyUWGjl%252BcVvjMuV%252BzioV7Q%3D%3D
RESET RESET1-RESET3 = Switches; BUILT_BY: EMA_UL_Team; CATEGORY: Tactile Switches; COPYRIGHT: Copyright (C) 2016 Accelerated Designs. All rights reserved; DESCRIPTION: FSMCH=3.5 X 6.0 X 4.3 TACT SWITCH, HT; MANUFACTURER_PART_NUMBER: 1825966-1; PART_STATUS: active; SERIES: Unknown; VENDOR: TE Connectivity
U1 U3 U4 U7 = TP4056; AVAILABILITY: Not in stock; CHECK_PRICES: https://www.snapeda.com/parts/TP4056/NanJing+Top+Power+ASIC+Corp./view-part/?ref=eda; DESCRIPTION: Complete single cell Li-Ion battery with a constant current / constant voltage linear charger; MF: NanJing Top Power ASIC Corp.; MP: TP4056; PACKAGE: Package; PRICE: None; SNAPEDA_LINK: https://www.snapeda.com/parts/TP4056/NanJing+Top+Power+ASIC+Corp./view-part/?ref=snap
U2 U5 U6 U8 = SI2301BDS-T1-E3; AVAILABILITY: In Stock; CHECK_PRICES: https://www.snapeda.com/parts/SI2301BDS-T1-E3/Vishay+Siliconix/view-part/?ref=eda; DESCRIPTION: MOSFET,P-Ch,VDSS -20V,RDS(ON) 0.08Ohm,ID -2.2A,TO-236 (SOT-23),PD 0.7W,VGS +/-8V | Siliconix / Vishay SI2301BDS-T1-E3; MF: Vishay; MP: SI2301BDS-T1-E3; PACKAGE: SOT-23-3 Vishay Siliconix; PRICE: None; PURCHASE-URL: https://www.snapeda.com/api/url_track_click_mouser/?unipart_id=277675&manufacturer=Vishay&part_name=SI2301BDS-T1-E3&search_term=si2301; SNAPEDA_LINK: https://www.snapeda.com/parts/SI2301BDS-T1-E3/Vishay+Siliconix/view-part/?ref=snap
USB USB1-USB3 = TYPE-C-31-M-12; AVAILABILITY: Not in stock; CHECK_PRICES: https://www.snapeda.com/parts/TYPE-C-31-M-12/HRO+Electronics+Co.%252C+Ltd./view-part/?ref=eda; DESCRIPTION: USB Connectors 24 Receptacle 1 8.94*7.3mm RoHS; MF: HRO Electronics Co., Ltd.; MP: TYPE-C-31-M-12; PACKAGE: Package; PRICE: None; SNAPEDA_LINK: https://www.snapeda.com/parts/TYPE-C-31-M-12/HRO+Electronics+Co.%252C+Ltd./view-part/?ref=snap

## Nets
0: ESP32.25 Q1.3
1: ESP1.25 Q3.3
2: ESP2.25 Q7.3
3: ESP3.25 Q10.3
3.3V: C15.2 C16.2 C20.2 C21.2 ESP32.2 EXT.4 IMU.2 L1.2 LED.1 R2.2 R51.1
3.3V1: C3.2 C4.2 C8.2 C9.2 ESP1.2 EXT1.4 IMU1.2 L2.2 LED1.1 R6.1 R27.2
3.3V2: C28.2 C29.2 C33.2 C34.2 ESP2.2 EXT2.4 IMU2.2 L3.2 LED2.1 R31.1 R42.2
3.3V3: C41.2 C42.2 C46.2 C47.2 ESP3.2 EXT3.4 IMU3.2 L4.2 LED3.1 R46.1 R58.2
+5V: BATT_SW.2 C1.2 IC2.1 IC2.4 R4.2
+5V1: BATT_SW1.2 C26.2 IC5.1 IC5.4 R29.2
+5V2: BATT_SW2.2 C39.2 IC9.1 IC9.4 R44.2
+5V3: BATT_SW3.2 C52.2 IC12.1 IC12.4 R60.2
BUTTON1: ESP32.30
BUTTON2: ESP1.30
BUTTON3: ESP2.30
BUTTON4: ESP3.30
CBUS1: IC1.17 RX.1
CBUS2: IC1.10 TX.1
CBUS3: IC3.17 RX1.1
CBUS4: IC3.10 TX1.1
CBUS5: IC7.17 RX2.1
CBUS6: IC7.10 TX2.1
CBUS7: IC10.17 RX3.1
CBUS8: IC10.10 TX3.1
CHRG: CHRG.1 U3.7
CHRG1: CHRG1.1 U1.7
CHRG2: CHRG2.1 U4.7
CHRG3: CHRG3.1 U7.7
D1: ESP1.6 R28.1 R29.1
D2: ESP1.7
D3: ESP1.8
D4: ESP1.9
D5: ESP32.29
D6: ESP1.10
D7: ESP1.11
D8: ESP1.12
D9: ESP1.37
D10: ESP1.29
D11: ESP2.6 R43.1 R44.1
D12: ESP2.7
D13: ESP2.8
D14: ESP2.9
D15: ESP2.10
D16: ESP2.11
D17: ESP2.12
D18: ESP2.37
D19: ESP2.29
D20: ESP3.6 R59.1 R60.1
D21: ESP3.7
D22: ESP3.8
D23: ESP32.37
D24: ESP3.9
D25: ESP32.10
D26: ESP32.11
D27: ESP32.12
D28: ESP3.10
D29: ESP3.11
D30: ESP3.12
D31: ESP3.37
D32: ESP32.8
D33: ESP32.9
D34: ESP32.6 R3.1 R4.1
D35: ESP32.7
D36: ESP3.29
D+: IC1.11 USB.A6 USB.B6
D+1: IC3.11 USB1.A6 USB1.B6
D+2: IC7.11 USB2.A6 USB2.B6
D+3: IC10.11 USB3.A6 USB3.B6
D-: IC1.12 USB.A7 USB.B7
D-1: IC3.12 USB1.A7 USB1.B7
D-2: IC7.12 USB2.A7 USB2.B7
D-3: IC10.12 USB3.A7 USB3.B7
DTR: IC1.1 Q1.2 R7.1
DTR1: IC3.1 Q3.2 R5.1
DTR2: IC7.1 Q7.2 R30.1
DTR3: IC10.1 Q10.2 R45.1
EN: C14.1 ESP32.3 Q2.3 R51.2 RESET.2
EN1: C2.1 ESP1.3 Q5.3 R6.2 RESET1.2
EN2: C27.1 ESP2.3 Q8.3 R31.2 RESET2.2
EN3: C40.1 ESP3.3 Q11.3 R46.2 RESET3.2
GND: C1.1 C14.2 C15.1 C16.1 C17.2 C18.1 C19.2 C20.1 C21.1 C22.1 C23.1 C25.1 ESP32.1 ESP32.15 ESP32.38 ESP32.39_1 ESP32.39_2 ESP32.39_3 ESP32.39_4 ESP32.39_5 ESP32.39_6 ESP32.39_7 ESP32.39_8 ESP32.39_9 ESP32.39_10 ESP32.39_11 ESP32.39_12 ESP32.39_13 ESP32.39_14 ESP32.39_15 ESP32.39_16 ESP32.39_17 ESP32.39_18 ESP32.39_19 ESP32.39_20 ESP32.39_21 EXT.1 IC1.6 IC1.16 IC2.2 IMU.3 IMU.7 Q4.6 Q4.7 R1.2 R3.2 R17.1 RESET.1 U3.3 USB.A1_B12 USB.B1_A12
GND1: C2.2 C3.1 C4.1 C5.2 C6.1 C7.2 C8.1 C9.1 C10.1 C11.1 C13.1 C26.1 ESP1.1 ESP1.15 ESP1.38 ESP1.39_1 ESP1.39_2 ESP1.39_3 ESP1.39_4 ESP1.39_5 ESP1.39_6 ESP1.39_7 ESP1.39_8 ESP1.39_9 ESP1.39_10 ESP1.39_11 ESP1.39_12 ESP1.39_13 ESP1.39_14 ESP1.39_15 ESP1.39_16 ESP1.39_17 ESP1.39_18 ESP1.39_19 ESP1.39_20 ESP1.39_21 EXT1.1 IC3.6 IC3.16 IC5.2 IMU1.3 IMU1.7 Q6.6 Q6.7 R25.1 R26.2 R28.2 RESET1.1 U1.3 USB1.A1_B12 USB1.B1_A12
GND2: C27.2 C28.1 C29.1 C30.2 C31.1 C32.2 C33.1 C34.1 C35.1 C36.1 C38.1 C39.1 ESP2.1 ESP2.15 ESP2.38 ESP2.39_1 ESP2.39_2 ESP2.39_3 ESP2.39_4 ESP2.39_5 ESP2.39_6 ESP2.39_7 ESP2.39_8 ESP2.39_9 ESP2.39_10 ESP2.39_11 ESP2.39_12 ESP2.39_13 ESP2.39_14 ESP2.39_15 ESP2.39_16 ESP2.39_17 ESP2.39_18 ESP2.39_19 ESP2.39_20 ESP2.39_21 EXT2.1 IC7.6 IC7.16 IC9.2 IMU2.3 IMU2.7 Q9.6 Q9.7 R40.1 R41.2 R43.2 RESET2.1 U4.3 USB2.A1_B12 USB2.B1_A12
GND3: C40.2 C41.1 C42.1 C43.2 C44.1 C45.2 C46.1 C47.1 C48.1 C49.1 C51.1 C52.1 ESP3.1 ESP3.15 ESP3.38 ESP3.39_1 ESP3.39_2 ESP3.39_3 ESP3.39_4 ESP3.39_5 ESP3.39_6 ESP3.39_7 ESP3.39_8 ESP3.39_9 ESP3.39_10 ESP3.39_11 ESP3.39_12 ESP3.39_13 ESP3.39_14 ESP3.39_15 ESP3.39_16 ESP3.39_17 ESP3.39_18 ESP3.39_19 ESP3.39_20 ESP3.39_21 EXT3.1 IC10.6 IC10.16 IC12.2 IMU3.3 IMU3.7 Q12.6 Q12.7 R56.1 R57.2 R59.2 RESET3.1 U7.3 USB3.A1_B12 USB3.B1_A12
LED: ESP32.31 R9.1
LED1: ESP1.31 R18.1
LED2: ESP2.31 R33.1
LED3: ESP3.31 R48.1
N$1: IC2.3 L1.1
N$2: Q5.1 R5.2
N$3: IC2.5 R1.1 R2.1
N$4: Q3.1 R11.2
N$5: R20.2 RX1.2
N$6: R19.2 TX1.2
N$7: CHRG1.2 R21.2
N$8: R22.2 STBY1.2
N$9: Q2.1 R7.2
N$10: R23.1 U1.1
N$11: Q1.1 R8.2
N$12: R12.2 RX.2
N$13: R10.2 TX.2
N$14: R23.2 U1.2
N$15: CHRG.2 R13.2
N$16: R14.2 STBY.2
N$17: R15.1 U3.1
N$18: R15.2 U3.2
N$19: C24.2 IC6.5 R16.1
N$20: IC6.1 Q4.4
N$21: IC6.2 R17.2
N$22: C12.2 IC4.5 R24.1
N$23: IC4.1 Q6.4
N$24: IC4.2 R25.2
N$25: IC4.3 Q6.5
N$26: IC6.3 Q4.5
N$27: LED.2 R9.2
N$28: LED1.2 R18.2
N$29: IC5.3 L2.1
N$30: IC5.5 R26.1 R27.1
N$31: Q8.1 R30.2
N$32: Q7.1 R32.2
N$33: R35.2 RX2.2
N$34: R34.2 TX2.2
N$35: CHRG2.2 R36.2
N$36: R37.2 STBY2.2
N$37: R38.1 U4.1
N$38: R38.2 U4.2
N$39: C37.2 IC8.5 R39.1
N$40: IC8.1 Q9.4
N$41: IC8.2 R40.2
N$42: IC8.3 Q9.5
N$43: LED2.2 R33.2
N$44: IC9.3 L3.1
N$45: IC9.5 R41.1 R42.1
N$46: Q11.1 R45.2
N$47: Q10.1 R47.2
N$48: R50.2 RX3.2
N$49: R49.2 TX3.2
N$50: CHRG3.2 R52.2
N$51: R53.2 STBY3.2
N$52: R54.1 U7.1
N$53: R54.2 U7.2
N$54: C50.2 IC11.5 R55.1
N$55: IC11.1 Q12.4
N$56: IC11.2 R56.2
N$57: IC11.3 Q12.5
N$58: LED3.2 R48.2
N$59: IC12.3 L4.1
N$60: IC12.5 R57.1 R58.1
RTS: IC1.2 Q2.2 R8.1
RTS1: IC3.2 Q5.2 R11.1
RTS2: IC7.2 Q8.2 R32.1
RTS3: IC10.2 Q11.2 R47.1
RX_DWM: ESP32.28
RX_DWM1: ESP1.28
RX_DWM2: ESP2.28
RX_DWM3: ESP3.28
SCL: ESP32.36 EXT.2 IMU.4
SCL1: ESP1.36 EXT1.2 IMU1.4
SCL2: ESP2.36 EXT2.2 IMU2.4
SCL3: ESP3.36 EXT3.2 IMU3.4
SD_HOST_CLK: ESP32.13
SD_HOST_CLK1: ESP1.13
SD_HOST_CLK2: ESP2.13
SD_HOST_CLK3: ESP3.13
SD_HOST_CMD: ESP32.23
SD_HOST_CMD1: ESP1.23
SD_HOST_CMD2: ESP2.23
SD_HOST_CMD3: ESP3.23
SD_HOST_D0: ESP32.24
SD_HOST_D1: ESP32.26
SD_HOST_D2: ESP32.14
SD_HOST_D3: ESP32.16
SD_HOST_D4: ESP1.24
SD_HOST_D5: ESP1.26
SD_HOST_D6: ESP1.16
SD_HOST_D7: ESP1.14
SD_HOST_D8: ESP2.24
SD_HOST_D9: ESP2.26
SD_HOST_D10: ESP2.16
SD_HOST_D11: ESP2.14
SD_HOST_D12: ESP3.24
SD_HOST_D13: ESP3.26
SD_HOST_D14: ESP3.16
SD_HOST_D15: ESP3.14
SDA: ESP32.33 EXT.3 IMU.5
SDA1: ESP1.33 EXT1.3 IMU1.5
SDA2: ESP2.33 EXT2.3 IMU2.5
SDA3: ESP3.33 EXT3.3 IMU3.5
STBY: STBY.1 U3.6
STBY1: STBY1.1 U1.6
STBY2: STBY2.1 U4.6
STBY3: STBY3.1 U7.6
TX_DWM: ESP32.27
TX_DWM1: ESP1.27
TX_DWM2: ESP2.27
TX_DWM3: ESP3.27
U0RXD: ESP32.34 IC1.20
U0RXD1: ESP1.34 IC3.20
U0RXD2: ESP2.34 IC7.20
U0RXD3: ESP3.34 IC10.20
U0TXD: ESP32.35 IC1.4
U0TXD1: ESP1.35 IC3.4
U0TXD2: ESP2.35 IC7.4
U0TXD3: ESP3.35 IC10.4
VBAT+: C25.2 P1.2 R16.2 U3.5 U6.3
VBAT+1: C13.2 P2.2 R24.2 U1.5 U2.3
VBAT+2: C38.2 P3.2 R39.2 U4.5 U5.3
VBAT+3: C51.2 P4.2 R55.2 U7.5 U8.3
VBAT-: C24.1 IC6.6 P1.1 Q4.2 Q4.3
VBAT-1: C12.1 IC4.6 P2.1 Q6.2 Q6.3
VBAT-2: C37.1 IC8.6 P3.1 Q9.2 Q9.3
VBAT-3: C50.1 IC11.6 P4.1 Q12.2 Q12.3
VBUS: C18.2 C19.1 C22.2 D1.A IC1.15 R13.1 R14.1 U3.4 U3.8 U6.1 USB.A4_B9 USB.B4_A9
VBUS1: C6.2 C7.1 C10.2 D2.A IC3.15 R21.1 R22.1 U1.4 U1.8 U2.1 USB1.A4_B9 USB1.B4_A9
VBUS2: C31.2 C32.1 C35.2 D3.A IC7.15 R36.1 R37.1 U4.4 U4.8 U5.1 USB2.A4_B9 USB2.B4_A9
VBUS3: C44.2 C45.1 C48.2 D4.A IC10.15 R52.1 R53.1 U7.4 U7.8 U8.1 USB3.A4_B9 USB3.B4_A9
VCC: BATT_SW.1 C17.1 C23.2 D1.C IC1.3 IC1.13 IC1.14 R10.1 R12.1 U6.2
VCC1: BATT_SW1.1 C5.1 C11.2 D2.C IC3.3 IC3.13 IC3.14 R19.1 R20.1 U2.2
VCC2: BATT_SW2.1 C30.1 C36.2 D3.C IC7.3 IC7.13 IC7.14 R34.1 R35.1 U5.2
VCC3: BATT_SW3.1 C43.1 C49.2 D4.C IC10.3 IC10.13 IC10.14 R49.1 R50.1 U8.2
VN: ESP32.5
VN1: ESP1.5
VN2: ESP2.5
VN3: ESP3.5
VP: ESP32.4
VP1: ESP1.4
VP2: ESP2.4
VP3: ESP3.4

## Tracks (layer width: path | path; a pad name or v marks a point on that pad's centre or on a via)
0  (via drill 0.35)
  Top 0.254: ESP32.25 15.29,7.29 16.13,8.13 19.53,8.13 20.17,8.76 20.17,18.44 19.92,18.69 v19.92,19.18 | v18.67,29.46 18.54,29.46 18.29,29.72 18.29,30.5 Q1.3
  Bottom 0.254: v19.92,19.18 21.23,20.49 21.23,21.1 21.21,21.12 21.21,24.51 20.19,25.53 20.19,28.83 19.56,29.46 v18.67,29.46
1  (via drill 0.35)
  Top 0.254: ESP1.25 64.46,32.2 63.63,31.37 60.22,31.37 59.59,30.73 59.59,21.06 59.84,20.8 v59.84,20.32 | v61.09,10.03 61.21,10.03 61.47,9.78 61.47,9 Q3.3
  Bottom 0.254: v59.84,20.32 58.52,19.01 58.52,18.4 58.55,18.37 58.55,14.99 59.56,13.97 59.56,10.67 60.2,10.03 v61.09,10.03
2  (via drill 0.35)
  Top 0.254: ESP2.25 15.29,47.8 16.13,48.64 19.53,48.64 20.17,49.28 20.17,58.95 19.92,59.2 v19.92,59.69 | v18.67,69.98 18.54,69.98 18.29,70.23 18.29,71.01 Q7.3
  Bottom 0.254: v19.92,59.69 21.23,61 21.23,61.61 21.21,61.64 21.21,65.02 20.19,66.04 20.19,69.34 19.56,69.98 v18.67,69.98
3  (via drill 0.35)
  Top 0.254: ESP3.25 64.46,72.72 63.63,71.88 60.22,71.88 59.59,71.25 59.59,61.57 59.84,61.32 v59.84,60.83 | v61.09,50.55 61.21,50.55 61.47,50.29 61.47,49.51 Q10.3
  Bottom 0.254: v59.84,60.83 58.52,59.52 58.52,58.91 58.55,58.89 58.55,55.5 59.56,54.48 59.56,51.18 60.2,50.55 v61.09,50.55
3.3V  (via drill 0.35)
  Top 0.254: C20.2 C21.2 8.76,36.83 9.05,36.83 | 9.05,36.83 9.14,36.83 9.31,36.67 R2.2 9.31,34.84 9.27,34.8 L1.2 7.53,34.12 7.37,34.29 5.97,34.29 5.46,34.8 2.08,34.8 EXT.4 | LED.1 29.4,1.46 29.46,1.4 32.89,1.4 33.27,1.78 v33.27,3.3 | v30.48,21.21 30.48,23.05 ESP32.2 30.53,24.54 30.73,24.74 35.33,24.74 35.94,24.13 37.46,24.13 37.88,24.55 C15.2 C16.2 R51.1 37.88,29.3 37.46,29.72 31.88,29.72 31.62,29.46 | 31.62,29.46 IMU.2 | 31.62,29.46 27.37,29.46 27.09,29.74 24.49,29.74 23.24,30.99 v23.24,31.88 | v9.51,37.29 9.05,36.83
  Bottom 0.254: v33.27,3.3 32,4.57 30.86,4.57 30.35,5.08 30.35,8.89 29.74,9.5 29.74,20.22 30.48,20.95 v30.48,21.21 | v23.24,31.88 23.24,32.51 23.6,32.87 23.6,36.27 22.69,37.17 22.69,37.34 22.48,37.54 9.76,37.54 v9.51,37.29
3.3V1  (via drill 0.35)
  Top 0.254: C8.2 C9.2 70.71,2.67 | 70.71,2.67 70.61,2.67 70.45,2.83 R27.2 70.45,4.66 70.48,4.7 L2.2 72.22,5.37 72.39,5.21 73.79,5.21 74.3,4.7 77.68,4.7 EXT1.4 | LED1.1 50.36,38.03 50.29,38.1 46.86,38.1 46.48,37.72 v46.48,36.19 | v49.28,18.29 49.28,16.45 ESP1.2 49.22,14.96 49.02,14.76 44.42,14.76 43.81,15.37 42.29,15.37 41.88,14.95 C3.2 C4.2 R6.1 41.87,10.2 42.29,9.78 47.88,9.78 48.13,10.03 | 48.13,10.03 IMU1.2 | 48.13,10.03 52.38,10.03 52.66,9.75 55.27,9.75 56.51,8.51 v56.51,7.62 | v70.25,2.21 70.71,2.67
  Bottom 0.254: v46.48,36.19 47.75,34.92 48.89,34.92 49.4,34.42 49.4,30.61 50.01,30 50.01,19.28 49.28,18.54 v49.28,18.29 | v56.51,7.62 56.51,6.98 56.16,6.63 56.16,3.23 57.07,2.32 57.07,2.16 57.27,1.96 70,1.96 v70.25,2.21
3.3V2  (via drill 0.35)
  Top 0.254: C33.2 C34.2 8.76,77.34 9.05,77.34 | 9.05,77.34 9.14,77.34 9.31,77.18 R42.2 9.31,75.35 9.27,75.31 L3.2 7.53,74.64 7.37,74.8 5.97,74.8 5.46,75.31 2.08,75.31 EXT2.4 | LED2.1 29.4,41.98 29.46,41.91 32.89,41.91 33.27,42.29 v33.27,43.81 | v30.48,61.72 30.48,63.56 ESP2.2 30.53,65.05 30.73,65.25 35.33,65.25 35.94,64.64 37.46,64.64 37.88,65.06 C28.2 C29.2 R31.1 37.88,69.81 37.46,70.23 31.88,70.23 31.62,69.98 | 31.62,69.98 IMU2.2 | 31.62,69.98 27.37,69.98 27.09,70.26 24.49,70.26 23.24,71.5 v23.24,72.39 | v9.51,77.8 9.05,77.34
  Bottom 0.254: v33.27,43.81 32,45.08 30.86,45.08 30.35,45.59 30.35,49.4 29.74,50.01 29.74,60.73 30.48,61.47 v30.48,61.72 | v23.24,72.39 23.24,73.03 23.6,73.38 23.6,76.78 22.69,77.69 22.69,77.85 22.48,78.05 9.76,78.05 v9.51,77.8
3.3V3  (via drill 0.35)
  Top 0.254: C46.2 C47.2 70.71,43.18 | 70.71,43.18 70.61,43.18 70.45,43.34 R58.2 70.45,45.17 70.48,45.21 L4.2 72.22,45.89 72.39,45.72 73.79,45.72 74.3,45.21 77.68,45.21 EXT3.4 | LED3.1 50.36,78.55 50.29,78.61 46.86,78.61 46.48,78.23 v46.48,76.71 | v49.28,58.8 49.28,56.96 ESP3.2 49.22,55.47 49.02,55.27 44.42,55.27 43.81,55.88 42.29,55.88 41.88,55.46 C41.2 C42.2 R46.1 41.87,50.71 42.29,50.29 47.88,50.29 48.13,50.55 | 48.13,50.55 IMU3.2 | 48.13,50.55 52.38,50.55 52.66,50.27 55.27,50.27 56.51,49.02 v56.51,48.13 | v70.25,42.72 70.71,43.18
  Bottom 0.254: v46.48,76.71 47.75,75.44 48.89,75.44 49.4,74.93 49.4,71.12 50.01,70.51 50.01,59.79 49.28,59.05 v49.28,58.8 | v56.51,48.13 56.51,47.5 56.16,47.14 56.16,43.75 57.07,42.84 57.07,42.67 57.27,42.47 70,42.47 v70.25,42.72
+5V  (via drill 0.35)
  Top 0.254: C1.2 13.33,35.14 IC2.4
  Top 0.406: IC2.4 13.01,33.84 v12.83,33.66 11.3,33.66 11.12,33.47 IC2.1 11.12,28.39 10.94,28.21 9.77,28.21 8.84,27.28 8.84,21.81 v8.12,21.09 | R4.2 15.37,26.42 15.62,26.66 15.62,27.06 15.62,27.07 15.62,27.81 16,28.19 v16,28.32 | BATT_SW.2 5.59,18.03 5.72,17.91 6.99,17.91 7.37,18.29 v7.37,18.8
  Bottom 0.406: v16,28.32 16,32 14.35,33.66 v12.83,33.66 | v7.37,18.8 7.37,20.34 v8.12,21.09
+5V1  (via drill 0.35)
  Top 0.254: C26.2 66.43,4.35 IC5.4
  Top 0.406: IC5.4 66.74,5.65 v66.93,5.84 68.45,5.84 68.64,6.03 IC5.1 68.64,11.11 68.82,11.29 69.99,11.29 70.92,12.21 70.92,17.68 v71.64,18.4 | R29.2 64.39,13.08 64.14,12.83 64.14,12.43 64.14,11.68 63.75,11.3 v63.75,11.18 | BATT_SW1.2 74.17,21.46 74.04,21.59 72.77,21.59 72.39,21.21 v72.39,20.7
  Bottom 0.406: v63.75,11.18 63.75,7.49 65.41,5.84 v66.93,5.84 | v72.39,20.7 72.39,19.16 v71.64,18.4
+5V2  (via drill 0.35)
  Top 0.254: C39.2 13.33,75.66 IC9.4
  Top 0.406: IC9.4 13.01,74.36 v12.83,74.17 11.3,74.17 11.12,73.98 IC9.1 11.12,68.9 10.94,68.72 9.77,68.72 8.84,67.8 8.84,62.33 v8.12,61.61 | R44.2 15.37,66.93 15.62,67.18 15.62,67.58 15.62,68.33 16,68.71 v16,68.83 | BATT_SW2.2 5.59,58.55 5.72,58.42 6.99,58.42 7.37,58.8 v7.37,59.31
  Bottom 0.406: v16,68.83 16,72.52 14.35,74.17 v12.83,74.17 | v7.37,59.31 7.37,60.86 v8.12,61.61
+5V3  (via drill 0.35)
  Top 0.254: C52.2 66.43,44.87 IC12.4
  Top 0.406: IC12.4 66.74,46.17 v66.93,46.36 68.45,46.36 68.64,46.54 IC12.1 68.64,51.62 68.82,51.8 69.99,51.8 70.92,52.73 70.92,58.19 v71.64,58.92 | R60.2 64.39,53.59 64.14,53.35 64.14,52.95 64.14,52.94 64.14,52.2 63.75,51.82 v63.75,51.69 | BATT_SW3.2 74.17,61.98 74.04,62.1 72.77,62.1 72.39,61.72 v72.39,61.21
  Bottom 0.406: v63.75,51.69 63.75,48.01 65.41,46.36 v66.93,46.36 | v72.39,61.21 72.39,59.67 v71.64,58.92
CBUS1  (via drill 0.35)
  Top 0.254: IC1.17 11.37,24.7 10.87,24.2 v10.23,24.2 | v25.91,2.38 26.03,2.26 RX.1
  Bottom 0.254: v10.23,24.2 9.65,23.62 9.65,23.24 9.12,22.71 4.25,22.71 3.66,22.12 3.66,21.82 3.43,21.59 3.43,19.89 3.28,19.74 3.28,2.5 4.63,1.14 14.35,1.14 14.73,1.52 14.73,2.9 14.99,3.15 19.14,3.15 20.56,1.73 22.75,1.73 23.41,2.38 v25.91,2.38
CBUS2  (via drill 0.35)
  Top 0.254: v22.48,2.38 22.61,2.26 TX.1 | IC1.10 6.6,20.68 v6.6,20.19
  Bottom 0.254: v22.48,2.38 20.48,2.38 19.3,3.56 14.73,3.56 14.22,3.05 14.22,1.91 14.1,1.78 4.57,1.78 3.68,2.67 3.68,18.68 4.31,19.3 6.22,19.3 6.6,19.69 v6.6,20.19
CBUS3  (via drill 0.35)
  Top 0.254: IC3.17 68.39,14.8 68.89,15.29 v69.52,15.29 | v53.85,37.11 53.72,37.24 RX1.1
  Bottom 0.254: v69.52,15.29 70.1,15.88 70.1,16.26 70.64,16.79 75.5,16.79 76.1,17.38 76.1,17.68 76.33,17.91 76.33,19.61 76.48,19.76 76.48,37 75.12,38.35 65.41,38.35 65.02,37.97 65.02,36.6 64.77,36.35 60.62,36.35 59.2,37.77 57.01,37.77 56.35,37.11 v53.85,37.11
CBUS4  (via drill 0.35)
  Top 0.254: v57.28,37.11 57.15,37.24 TX1.1 | IC3.10 73.15,18.81 v73.15,19.3
  Bottom 0.254: v57.28,37.11 59.28,37.11 60.45,35.94 65.02,35.94 65.53,36.45 65.53,37.59 65.66,37.72 75.18,37.72 76.07,36.83 76.07,20.82 75.45,20.19 73.53,20.19 73.15,19.81 v73.15,19.3
CBUS5  (via drill 0.35)
  Top 0.254: IC7.17 11.37,65.21 10.87,64.72 v10.23,64.72 | v25.91,42.89 26.03,42.77 RX2.1
  Bottom 0.254: v10.23,64.72 9.65,64.14 9.65,63.75 9.12,63.22 4.25,63.22 3.66,62.63 3.66,62.33 3.43,62.1 3.43,60.4 3.28,60.25 3.28,43.01 4.63,41.66 14.35,41.66 14.73,42.04 14.73,43.41 14.99,43.66 19.14,43.66 20.56,42.24 22.75,42.24 23.41,42.89 v25.91,42.89
CBUS6  (via drill 0.35)
  Top 0.254: v22.48,42.89 22.61,42.77 TX2.1 | IC7.10 6.6,61.19 v6.6,60.71
  Bottom 0.254: v22.48,42.89 20.48,42.89 19.3,44.07 14.73,44.07 14.22,43.56 14.22,42.42 14.1,42.29 4.57,42.29 3.68,43.18 3.68,59.19 4.31,59.82 6.22,59.82 6.6,60.2 v6.6,60.71
CBUS7  (via drill 0.35)
  Top 0.254: IC10.17 68.39,55.31 68.89,55.81 v69.52,55.81 | v53.85,77.63 53.72,77.75 RX3.1
  Bottom 0.254: v69.52,55.81 70.1,56.39 70.1,56.77 70.64,57.3 75.5,57.3 76.1,57.89 76.1,58.19 76.33,58.42 76.33,60.12 76.48,60.27 76.48,77.51 75.12,78.87 65.41,78.87 65.02,78.49 65.02,77.11 64.77,76.86 60.62,76.86 59.2,78.28 57.01,78.28 56.35,77.63 v53.85,77.63
CBUS8  (via drill 0.35)
  Top 0.254: v57.28,77.63 57.15,77.75 TX3.1 | IC10.10 73.15,59.33 v73.15,59.82
  Bottom 0.254: v57.28,77.63 59.28,77.63 60.45,76.45 65.02,76.45 65.53,76.96 65.53,78.11 65.66,78.23 75.18,78.23 76.07,77.34 76.07,61.33 75.45,60.71 73.53,60.71 73.15,60.33 v73.15,59.82
CHRG  (via drill 0.35)
  Top 0.254: CHRG.1 12.13,1.46 12.45,1.14 13.84,1.14 14.22,1.52 14.22,4.02 13.74,4.5 13.74,6.18 v13.32,6.59
  Bottom 0.254: v13.32,6.59 13.32,7.35 13.33,7.37 13.33,7.68 11.87,9.14 11.11,9.14 U3.7
  other vias: 9.65,10.6
CHRG1  (via drill 0.35)
  Top 0.254: CHRG1.1 67.63,38.03 67.31,38.35 65.91,38.35 65.53,37.97 65.53,35.48 66.02,35 66.02,33.32 v66.43,32.9
  Bottom 0.254: v66.43,32.9 66.43,32.14 66.42,32.13 66.42,31.82 67.89,30.35 68.65,30.35 U1.7
  other vias: 70.1,28.89
CHRG2  (via drill 0.35)
  Top 0.254: CHRG2.1 12.13,41.98 12.45,41.66 13.84,41.66 14.22,42.04 14.22,44.53 13.74,45.01 13.74,46.69 v13.32,47.11
  Bottom 0.254: v13.32,47.11 13.32,47.87 13.33,47.88 13.33,48.19 11.87,49.66 11.11,49.66 U4.7
  other vias: 9.65,51.12
CHRG3  (via drill 0.35)
  Top 0.254: CHRG3.1 67.63,78.55 67.31,78.87 65.91,78.87 65.53,78.49 65.53,75.99 66.02,75.51 66.02,73.83 v66.43,73.42
  Bottom 0.254: v66.43,73.42 66.43,72.66 66.42,72.64 66.42,72.33 67.89,70.87 68.65,70.87 U7.7
  other vias: 70.1,69.41
D1
  Top 0.254: R28.1 64.14,14.48 64.01,14.35 64.01,13.38 63.71,13.08 R29.1 62.61,13.08 61.44,14.25 58.27,14.25 58.04,14.48 54.86,14.48 54.3,15.04 ESP1.6
D11
  Top 0.254: R43.1 15.62,65.53 15.75,65.66 15.75,66.63 16.05,66.93 R44.1 17.15,66.93 18.31,65.76 21.49,65.76 21.72,65.53 24.89,65.53 25.45,64.97 ESP2.6
D20
  Top 0.254: R59.1 64.14,54.99 64.01,54.86 64.01,53.89 63.71,53.59 R60.1 62.61,53.59 61.44,54.76 58.27,54.76 58.04,54.99 54.86,54.99 54.3,55.55 ESP3.6
D34
  Top 0.254: R3.1 15.62,25.02 15.75,25.15 15.75,26.11 16.05,26.42 R4.1 17.15,26.42 18.31,25.25 21.49,25.25 21.72,25.02 24.89,25.02 25.45,24.46 ESP32.6
D+  (via drill 0.35)
  Top 0.254: USB.A6 5.58,8.51 | 5.58,8.51 5.46,8.38 5.46,7.62 5.59,7.49 6.52,7.49 USB.B6 | IC1.11 10.86,20.89 10.29,20.32 9.42,20.32 v9.12,20.02 | v6.08,16.78 6.08,16.28 5.95,16.15 5.95,15.6 6.2,15.35 6.2,14.45 5.87,14.12 5.04,14.12 4.04,13.12 4.04,12.34 3.61,11.91 3.61,9.79 4.89,8.51 5.58,8.51
  Bottom 0.254: v9.12,20.02 9.12,19.2 9.37,18.95 9.37,18.2 8.34,17.17 6.82,17.17 6.79,17.14 6.44,17.14 v6.08,16.78
D+1  (via drill 0.35)
  Top 0.254: USB1.A6 74.17,30.99 | 74.17,30.99 74.3,31.11 74.3,31.88 74.17,32 73.24,32 USB1.B6 | IC3.11 68.9,18.61 69.47,19.18 70.34,19.18 v70.64,19.48 | v73.68,22.71 73.68,23.22 73.81,23.35 73.81,23.89 73.56,24.15 73.56,25.04 73.89,25.38 74.72,25.38 75.72,26.38 75.72,27.16 76.15,27.59 76.15,29.71 74.87,30.99 74.17,30.99
  Bottom 0.254: v70.64,19.48 70.64,20.3 70.38,20.55 70.38,21.3 71.42,22.33 72.94,22.33 72.97,22.35 73.32,22.35 v73.68,22.71
D+2  (via drill 0.35)
  Top 0.254: USB2.A6 5.58,49.02 | 5.58,49.02 5.46,48.89 5.46,48.13 5.59,48.01 6.52,48.01 USB2.B6 | IC7.11 10.86,61.4 10.29,60.83 9.42,60.83 v9.12,60.53 | v6.08,57.3 6.08,56.79 5.95,56.66 5.95,56.12 6.2,55.86 6.2,54.97 5.87,54.64 5.04,54.64 4.04,53.64 4.04,52.85 3.61,52.42 3.61,50.3 4.89,49.02 5.58,49.02
  Bottom 0.254: v9.12,60.53 9.12,59.71 9.37,59.46 9.37,58.72 8.34,57.68 6.82,57.68 6.79,57.66 6.44,57.66 v6.08,57.3
D+3  (via drill 0.35)
  Top 0.254: USB3.A6 74.17,71.5 | 74.17,71.5 74.3,71.63 74.3,72.39 74.17,72.52 73.24,72.52 USB3.B6 | IC10.11 68.9,59.12 69.47,59.69 70.34,59.69 v70.64,59.99 | v73.68,63.23 73.68,63.73 73.81,63.86 73.81,64.41 73.56,64.66 73.56,65.56 73.89,65.89 74.72,65.89 75.72,66.89 75.72,67.67 76.15,68.1 76.15,70.22 74.87,71.5 74.17,71.5
  Bottom 0.254: v70.64,59.99 70.64,60.81 70.38,61.06 70.38,61.81 71.42,62.84 72.94,62.84 72.97,62.86 73.32,62.86 v73.68,63.23
D-  (via drill 0.35)
  Top 0.254: USB.A7 7.24,8 7.49,8.26 7.49,8.76 7.25,9.01 USB.B7 4.97,9.01 4.01,9.95 4.01,11.74 4.45,12.17 4.45,12.95 5.21,13.72 6.35,13.72 6.6,13.97 v6.6,15.88 | v10.13,21.32 10.28,21.46 12.17,21.46 IC1.12
  Bottom 0.254: v6.6,15.88 6.6,16.38 6.99,16.76 8.51,16.76 9.78,18.03 9.78,20.96 v10.13,21.32
D-1  (via drill 0.35)
  Top 0.254: USB1.A7 72.52,31.5 72.26,31.24 72.26,30.73 72.51,30.49 USB1.B7 74.79,30.49 75.74,29.54 75.74,27.75 75.31,27.32 75.31,26.54 74.55,25.78 73.41,25.78 73.15,25.53 v73.15,23.62 | v69.62,18.18 69.48,18.03 67.58,18.03 IC3.12
  Bottom 0.254: v73.15,23.62 73.15,23.11 72.77,22.73 71.25,22.73 69.98,21.46 69.98,18.53 v69.62,18.18
D-2  (via drill 0.35)
  Top 0.254: USB2.A7 7.24,48.51 7.49,48.77 7.49,49.28 7.25,49.52 USB2.B7 4.97,49.52 4.01,50.47 4.01,52.26 4.45,52.69 4.45,53.47 5.21,54.23 6.35,54.23 6.6,54.48 v6.6,56.39 | v10.13,61.83 10.28,61.98 12.17,61.98 IC7.12
  Bottom 0.254: v6.6,56.39 6.6,56.9 6.99,57.28 8.51,57.28 9.78,58.55 9.78,61.48 v10.13,61.83
D-3  (via drill 0.35)
  Top 0.254: USB3.A7 72.52,72.01 72.26,71.75 72.26,71.25 72.51,71 USB3.B7 74.79,71 75.74,70.05 75.74,68.27 75.31,67.84 75.31,67.06 74.55,66.29 73.41,66.29 73.15,66.04 v73.15,64.14 | v69.62,58.69 69.48,58.55 67.58,58.55 IC10.12
  Bottom 0.254: v73.15,64.14 73.15,63.63 72.77,63.25 71.25,63.25 69.98,61.98 69.98,59.05 v69.62,58.69
DTR  (via drill 0.35)
  Top 0.254: IC1.1 7.63,26.61 7.95,26.92 7.95,27.65 8.23,27.93 8.23,30.32 8.49,30.58 v8.49,31.29 | v18.03,35.05 17.95,35.14 R7.1 | Q1.2 16.96,29.66 17.4,30.1 17.4,30.96 18.58,32.15 19.96,32.15 20.62,32.81 20.62,33.83 20.95,34.16 v20.95,34.67
  Bottom 0.254: v8.49,31.29 8.49,31.86 8.87,32.23 8.87,34.46 9.23,34.82 13.63,34.82 13.88,34.57 17.04,34.57 17.53,35.05 v18.03,35.05 20.57,35.05 v20.95,34.67
DTR1  (via drill 0.35)
  Top 0.254: IC3.1 72.12,12.89 71.81,12.57 71.81,11.85 71.53,11.57 71.53,9.18 71.26,8.91 v71.26,8.2 | v61.72,4.45 61.81,4.36 R5.1 | Q3.2 62.8,9.84 62.36,9.4 62.36,8.53 61.17,7.35 59.79,7.35 59.13,6.69 59.13,5.66 58.8,5.33 v58.8,4.83
  Bottom 0.254: v71.26,8.2 71.26,7.63 70.89,7.26 70.89,5.04 70.53,4.67 66.13,4.67 65.87,4.93 62.71,4.93 62.23,4.45 v61.72,4.45 59.18,4.45 v58.8,4.83
DTR2  (via drill 0.35)
  Top 0.254: IC7.1 7.63,67.12 7.95,67.44 7.95,68.16 8.23,68.44 8.23,70.83 8.49,71.1 v8.49,71.81 | v18.03,75.56 17.95,75.65 R30.1 | Q7.2 16.96,70.17 17.4,70.61 17.4,71.47 18.58,72.66 19.96,72.66 20.62,73.32 20.62,74.35 20.95,74.68 v20.95,75.18
  Bottom 0.254: v8.49,71.81 8.49,72.38 8.87,72.75 8.87,74.97 9.23,75.34 13.63,75.34 13.88,75.08 17.04,75.08 17.53,75.56 v18.03,75.56 20.57,75.56 v20.95,75.18
DTR3  (via drill 0.35)
  Top 0.254: IC10.1 72.12,53.4 71.81,53.09 71.81,52.36 71.53,52.08 71.53,49.69 71.26,49.43 v71.26,48.72 | v61.72,44.96 61.81,44.87 R45.1 | Q10.2 62.8,50.35 62.36,49.91 62.36,49.05 61.17,47.86 59.79,47.86 59.13,47.2 59.13,46.18 58.8,45.85 v58.8,45.34
  Bottom 0.254: v71.26,48.72 71.26,48.15 70.89,47.78 70.89,45.55 70.53,45.19 66.13,45.19 65.87,45.44 62.71,45.44 62.23,44.96 v61.72,44.96 59.18,44.96 v58.8,45.34
EN  (via drill 0.35)
  Top 0.254: Q2.3 v17.4,33.91 | 29.26,24.46 ESP32.3 29.26,21.52 28.19,20.45 v28.19,18.41 | C14.1 20.4,29.64 20.7,29.34 26.92,29.34 27.81,28.45 27.81,25.4 28.07,25.15 28.57,25.15 29.26,24.46 | 29.26,24.46 29.95,25.15 35.31,25.15 35.56,25.4 35.56,27.43 35.69,27.56 R51.2 | RESET.2 37.08,3.05 35.81,4.32 29.21,4.32 v29.08,4.45
  Bottom 0.254: v17.4,33.91 17.02,33.53 17.02,31.24 17.53,30.73 20.32,30.73 C14.1 | v29.08,4.45 29.08,7.83 28.68,8.24 28.68,9.04 27.54,10.18 27.54,11.19 27.56,11.22 27.56,11.68 28.52,12.65 28.52,18.09 v28.19,18.41
  other vias: 20.4,30.66
EN1  (via drill 0.35)
  Top 0.254: Q5.3 v62.36,5.59 | 50.49,15.04 ESP1.3 50.49,17.98 51.56,19.05 v51.56,21.08 | C2.1 59.36,9.86 59.05,10.16 52.83,10.16 51.94,11.05 51.94,14.1 51.69,14.35 51.18,14.35 50.49,15.04 | 50.49,15.04 49.8,14.35 44.45,14.35 44.2,14.1 44.2,12.06 44.07,11.94 R6.2 | RESET1.2 42.67,36.45 43.94,35.18 50.55,35.18 v50.67,35.05
  Bottom 0.254: v62.36,5.59 62.74,5.97 62.74,8.26 62.23,8.76 59.43,8.76 C2.1 | v50.67,35.05 50.67,31.66 51.08,31.26 51.08,30.46 52.22,29.31 52.22,28.3 52.2,28.28 52.2,27.81 51.23,26.85 51.23,21.41 v51.56,21.08
  other vias: 59.36,8.84
EN2  (via drill 0.35)
  Top 0.254: Q8.3 v17.4,74.42 | 29.26,64.97 ESP2.3 29.26,62.03 28.19,60.96 v28.19,58.93 | C27.1 20.4,70.15 20.7,69.85 26.92,69.85 27.81,68.96 27.81,65.91 28.07,65.66 28.57,65.66 29.26,64.97 | 29.26,64.97 29.95,65.66 35.31,65.66 35.56,65.91 35.56,67.94 35.69,68.07 R31.2 | RESET2.2 37.08,43.56 35.81,44.83 29.21,44.83 v29.08,44.96
  Bottom 0.254: v17.4,74.42 17.02,74.04 17.02,71.75 17.53,71.25 20.32,71.25 C27.1 | v29.08,44.96 29.08,48.35 28.68,48.75 28.68,49.55 27.54,50.7 27.54,51.71 27.56,51.73 27.56,52.2 28.52,53.16 28.52,58.6 v28.19,58.93
  other vias: 20.4,71.17
EN3  (via drill 0.35)
  Top 0.254: Q11.3 v62.36,46.1 | 50.49,55.55 ESP3.3 50.49,58.49 51.56,59.56 v51.56,61.59 | C40.1 59.36,50.37 59.05,50.67 52.83,50.67 51.94,51.56 51.94,54.61 51.69,54.86 51.18,54.86 50.49,55.55 | 50.49,55.55 49.8,54.86 44.45,54.86 44.2,54.61 44.2,52.58 44.07,52.45 R46.2 | RESET3.2 42.67,76.96 43.94,75.69 50.55,75.69 v50.67,75.56
  Bottom 0.254: v62.36,46.1 62.74,46.48 62.74,48.77 62.23,49.28 59.43,49.28 C40.1 | v50.67,75.56 50.67,72.18 51.08,71.77 51.08,70.97 52.22,69.83 52.22,68.82 52.2,68.79 52.2,68.33 51.23,67.36 51.23,61.92 v51.56,61.59
  other vias: 59.36,49.35
GND  (via drill 0.35)
  Top 0.254: C20.1 C21.1 | Q4.6 Q4.7
  Top 0.406: C19.2 C18.1
  other vias: 37.85,36.83 21.97,33.27 19.05,36.32 15.24,35.94 37.34,37.59 36.45,38.1 37.97,35.69 21.97,32.39 17.15,27.81 17.78,24.77 17.53,17.14 23.88,20.19 22.86,11.05 17.53,12.06 16.26,9.14 22.86,8.13 19.3,4.32 16.89,4.45 23.75,11.05 31.24,11.05 23.75,8.13 7.11,13.46 11.68,14.73 8,4.06 4.45,3.56 16.26,20.7 5.46,23.62 4.45,31.5 31.24,19.05 35.43,28.83 34.92,31.11 35.81,31.11 35.81,32 34.92,32 7.49,30.35 7.37,28.45 12.06,28.7 5.46,35.81 3.94,27.3
  pour Bottom: -0.13,-0.63 39.37,-0.63 39.37,5.46 32.38,5.46 32.26,5.59 32.26,23.37 32.64,23.75 39.37,23.75 39.5,23.88 39.5,39.5 39.37,39.62 0,39.62 -0.13,39.5
  pour Top: 39.37,5.46 32.38,5.46 32.26,5.59 32.26,23.37 32.64,23.75 39.37,23.75 39.5,23.88 39.5,39.5 39.37,39.62 0,39.62 -0.13,39.5 -0.13,-0.63 39.37,-0.63
GND1  (via drill 0.35)
  Top 0.254: C8.1 C9.1 | Q6.6 Q6.7
  Top 0.406: C7.2 C6.1
  other vias: 41.91,2.67 57.79,6.22 60.71,3.17 64.52,3.56 42.42,1.91 43.31,1.4 41.78,3.81 57.79,7.11 62.61,11.68 61.98,14.73 62.23,22.35 55.88,19.3 56.9,28.45 62.23,27.43 63.5,30.35 56.9,31.37 60.45,35.18 62.87,35.05 56.01,28.45 48.51,28.45 56.01,31.37 72.64,26.03 68.07,24.77 71.76,35.43 75.31,35.94 63.5,18.8 74.3,15.88 75.31,8 48.51,20.45 44.32,10.67 44.83,8.38 43.94,8.38 43.94,7.49 44.83,7.49 72.26,9.14 72.39,11.05 67.69,10.8 74.3,3.68 75.82,12.19
  pour Bottom: 79.88,40.13 40.26,40.13 40.26,34.04 47.37,34.04 47.5,33.91 47.5,16.13 47.12,15.75 40.39,15.75 40.26,15.62 40.26,0 40.39,-0.13 79.76,-0.13 79.88,0
  pour Top: 40.26,34.04 47.37,34.04 47.5,33.91 47.5,16.13 47.12,15.75 40.39,15.75 40.26,15.62 40.26,0 40.39,-0.13 79.76,-0.13 79.88,0 79.88,40.13 40.26,40.13
GND2  (via drill 0.35)
  Top 0.254: C33.1 C34.1 | Q9.6 Q9.7
  Top 0.406: C32.2 C31.1
  other vias: 37.85,77.34 21.97,73.79 19.05,76.83 15.24,76.45 37.34,78.11 36.45,78.61 37.97,76.2 21.97,72.9 17.15,68.33 17.78,65.28 17.53,57.66 23.88,60.71 22.86,51.56 17.53,52.58 16.26,49.66 22.86,48.64 19.3,44.83 16.89,44.96 23.75,51.56 31.24,51.56 23.75,48.64 7.11,53.97 11.68,55.25 8,44.58 4.45,44.07 16.26,61.21 5.46,64.14 4.45,72.01 31.24,59.56 35.43,69.34 34.92,71.63 35.81,71.63 35.81,72.52 34.92,72.52 7.49,70.87 7.37,68.96 12.06,69.22 5.46,76.33 3.94,67.82
  pour Bottom: -0.13,39.88 39.37,39.88 39.37,45.97 32.38,45.97 32.26,46.1 32.26,63.88 32.64,64.26 39.37,64.26 39.5,64.39 39.37,80.14 0,80.14 -0.13,80.01
  pour Top: 39.37,45.97 32.38,45.97 32.26,46.1 32.26,63.88 32.64,64.26 39.37,64.26 39.5,64.39 39.5,80.01 39.37,80.14 0,80.14 -0.13,80.01 -0.13,39.88 39.37,39.88
GND3  (via drill 0.35)
  Top 0.254: C46.1 C47.1 | Q12.6 Q12.7
  Top 0.406: C45.2 C44.1